# EAGLE board PCB (EAGLE 9.7.0)
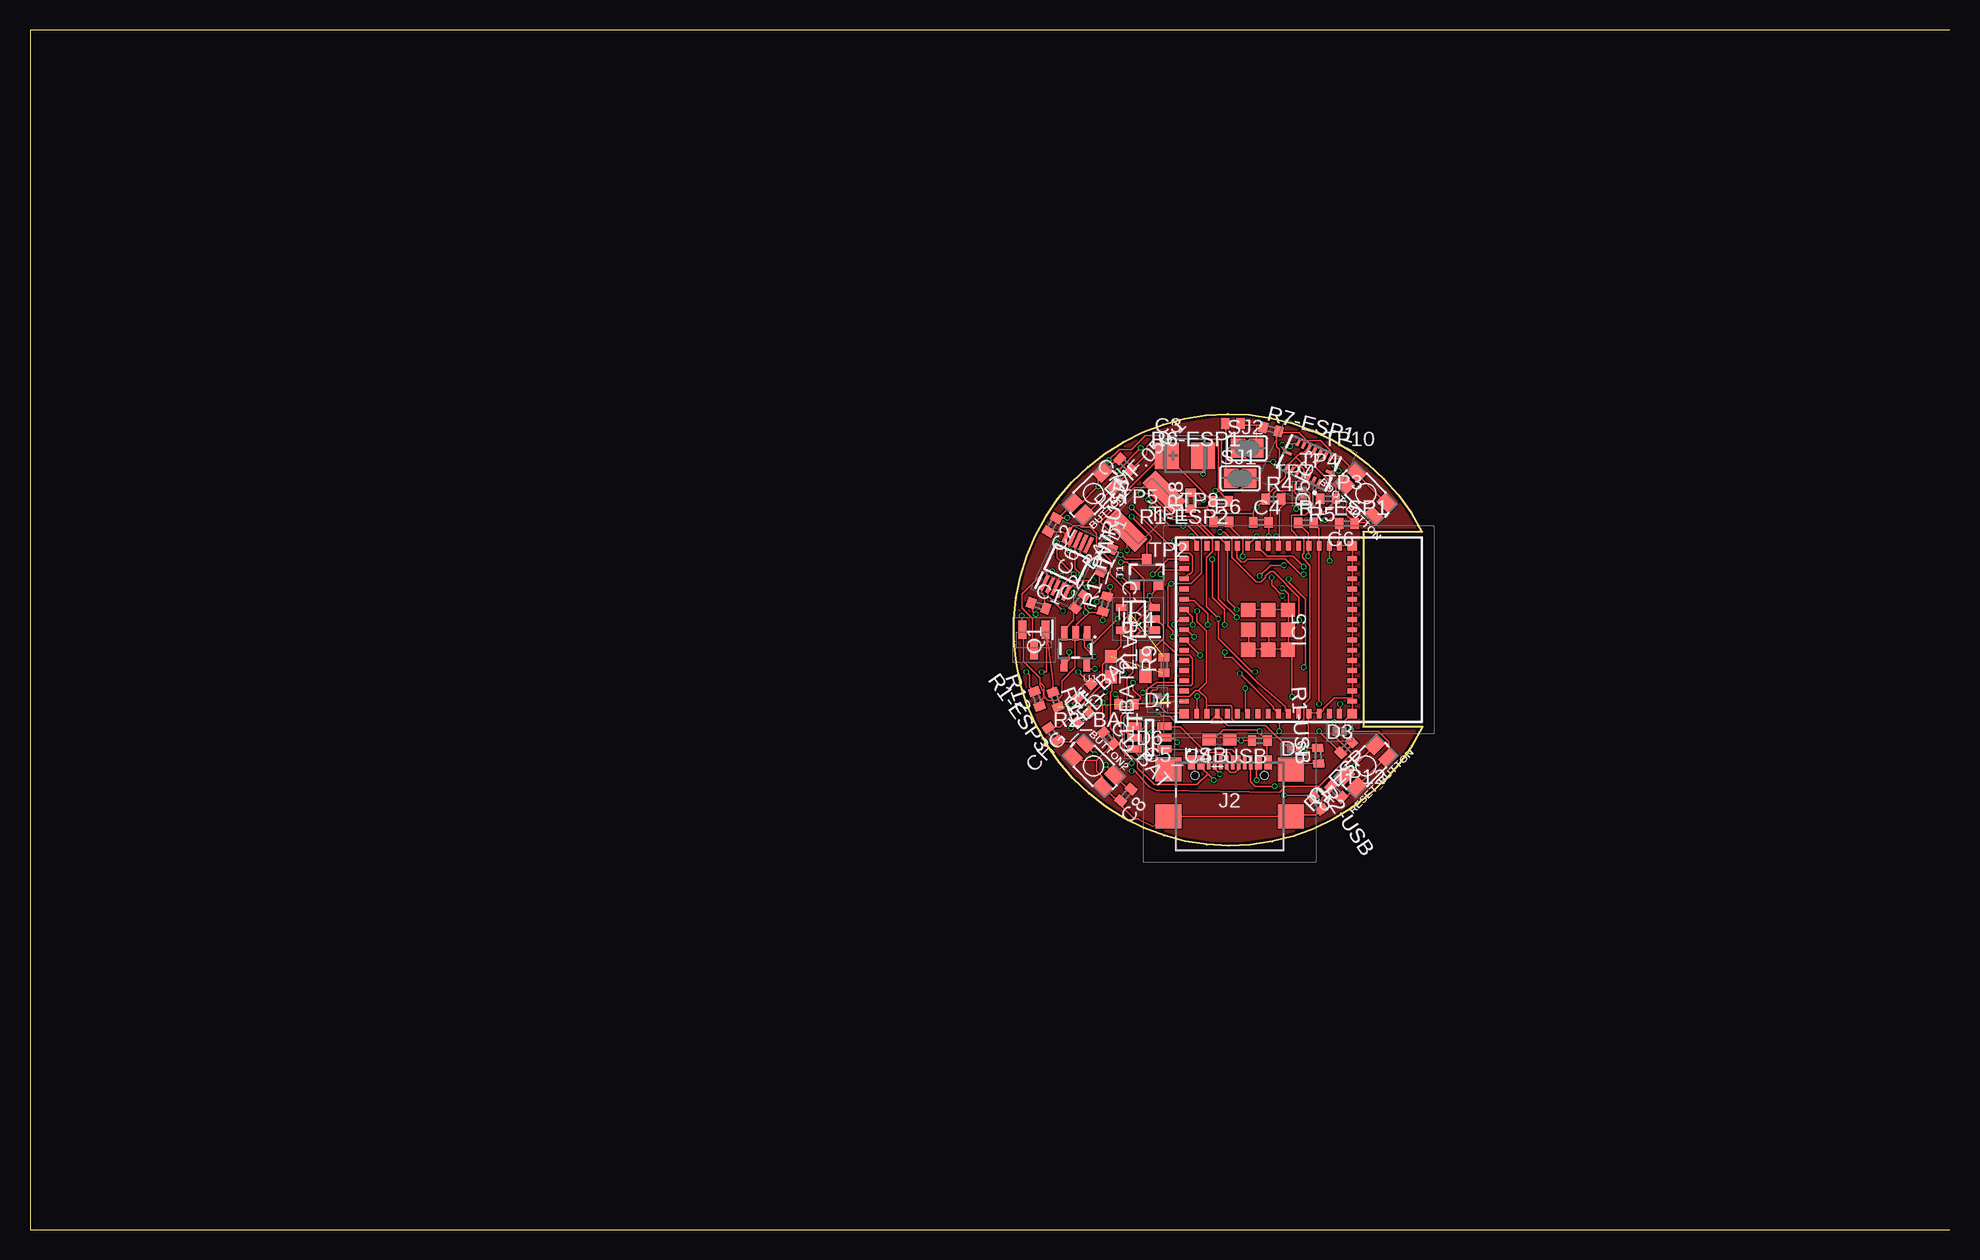
[diagram p0: board, top side]
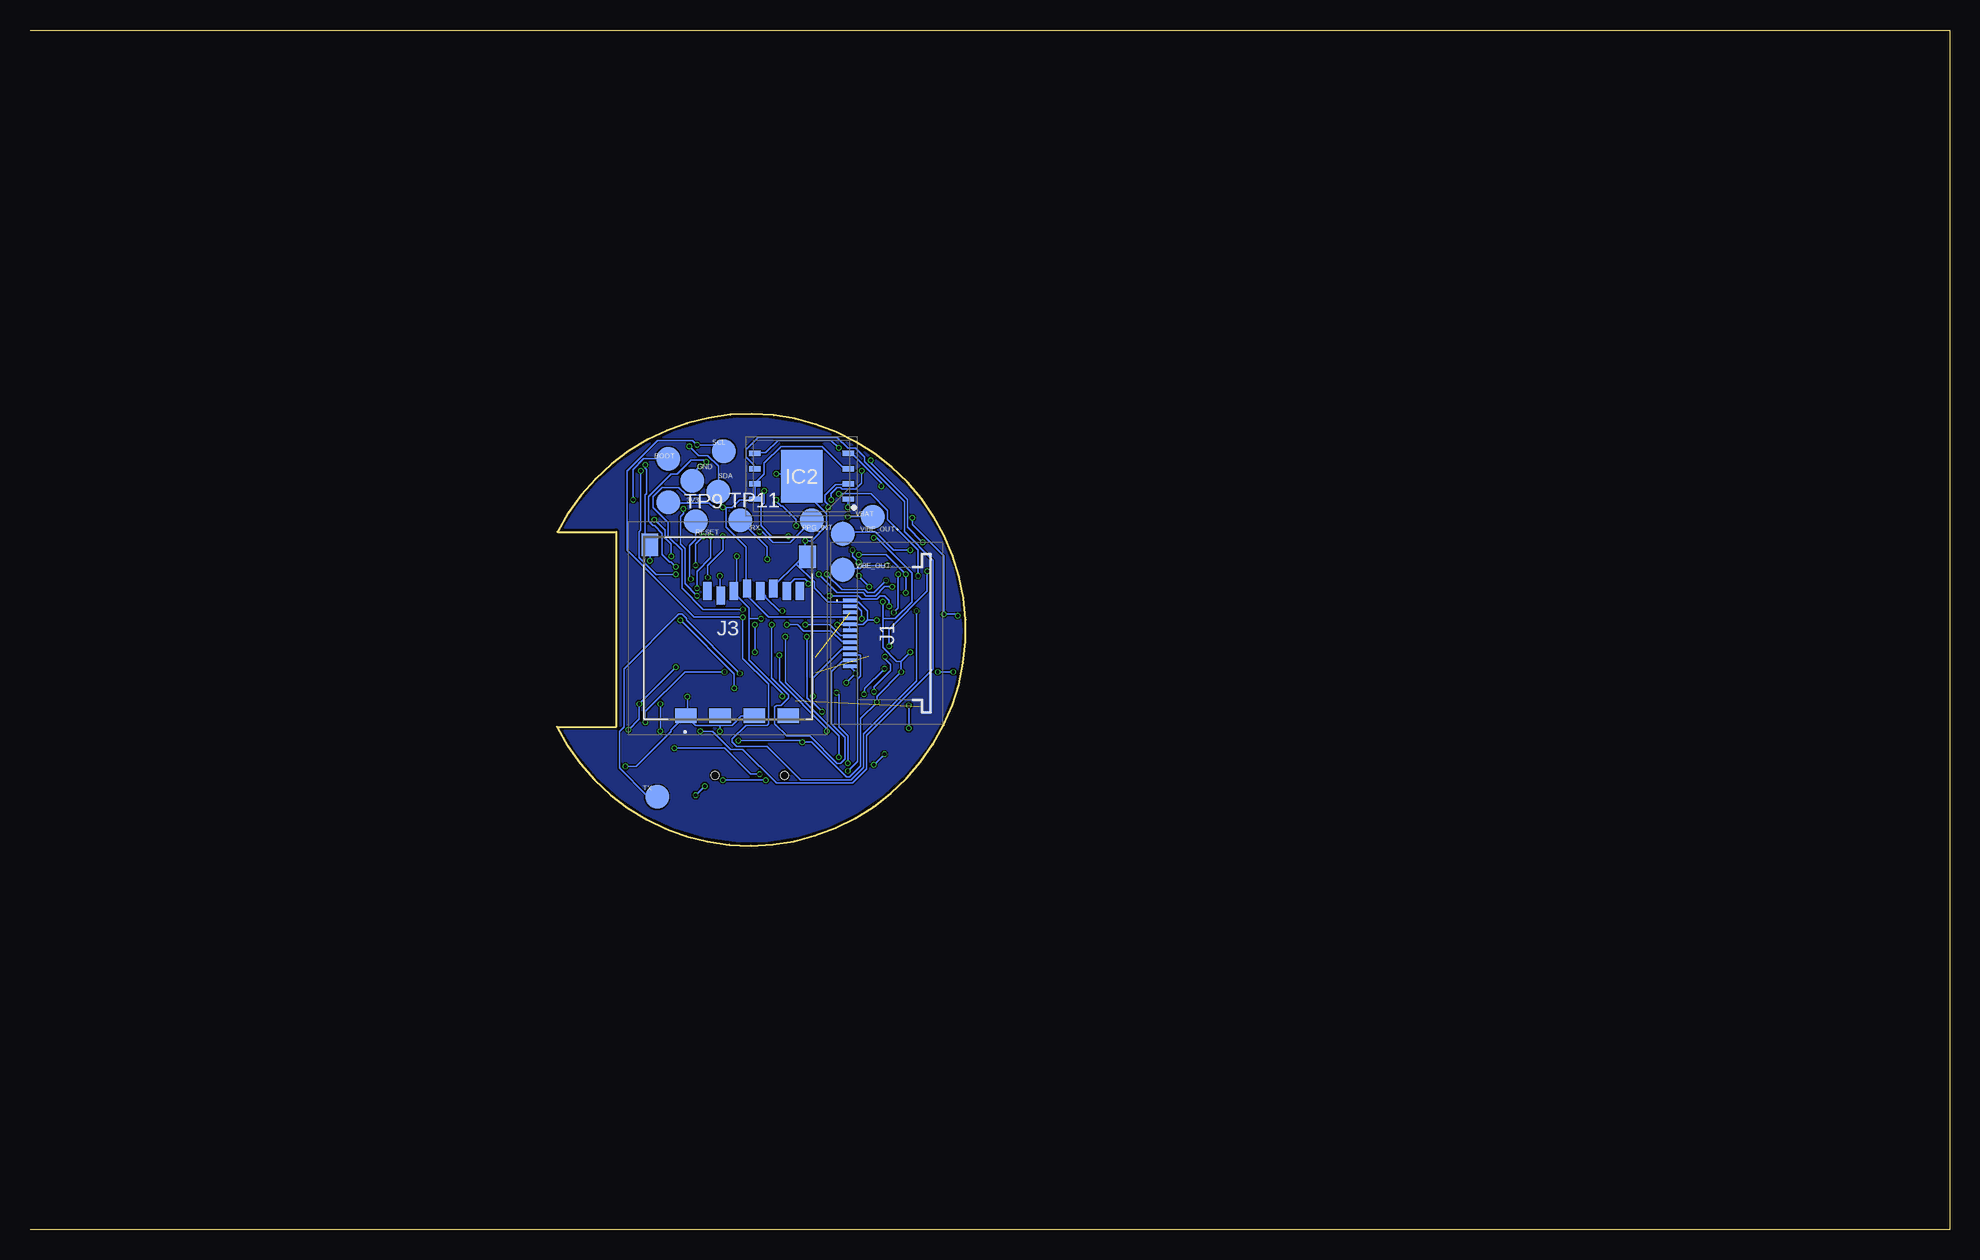
[diagram p1: board, bottom side, seen from below]

Size 160 x 100 mm. Coordinates in mm from the lower left corner, seen from the top.
Outline: 160,0 0,0 0,100 160,100
Outline: 116.08,41.91 arc-306 116.03,58.16 111.13,58.16 111.13,41.91 116.08,41.91
Copper layers (1*16): Top / Bottom
Stack-up Default Layer Stack: Top User Defined 0.035mm / Dielectric-1 User Defined 1.6mm / Bottom User Defined 0.035mm
Design rules: minimum copper width 5mil, minimum drill size 0.3mm, copper clearance wire_polygon to wire_polygon 5mil, copper clearance wire_polygon to pad_smd 5mil, copper clearance wire_polygon to via 5mil, copper clearance pad_smd to pad_smd 5mil, copper clearance pad_smd to via 5mil, copper clearance via to via 5mil, copper clearance smd to pad (same net) 5mil, copper clearance smd to via (same net) 5mil, copper clearance smd to smd (same net) 5mil, dimension clearance 0.2mm, restrict clearance 0mil, via restrict clearance 0mil, drill distance 6mil, keepout clearance 0mil

## Footprints (pad centres in the part's own frame; a part is rotated, then mirrored left to right if it is on the bottom)
SPARKFUN-SWITCHES_TACTILE_SWITCH_SMD_4.6X2.8MM = smd 1.4 x 1.05: 1 -1.796,-0.673; 2 1.796,-0.673; 3 1.796,0.673 | smd 1.4 x 0.9: 4 -1.796,0.8
EAGLE-LTSPICE_C0402 = smd 0.7 x 0.9: 1 -0.65,0; 2 0.65,0
RCL_C0603 = smd 1.1 x 1: 1 -0.85,0; 2 0.85,0
CT3528 = smd 2 x 2.2: + -1.5,0; - 1.5,0
ADAFRUIT_CHIP-LED0603 = smd 0.8 x 0.8: A 0,-0.75; C 0,0.75
AVX---SD0805S020S1R0_AVX_SD0805S020S1R0_0 = smd 0.8 x 0.9: 1 -1.05,0; 2 1.05,0
PESD5V0S1BL315 = smd 0.4 x 0.7: 1 -0.35,0; 2 0.35,0
SOT95P280X145-6N = smd 1.2 x 0.6: 1 -1.25,0.95; 2 -1.25,0; 3 -1.25,-0.95; 4 1.25,-0.95; 5 1.25,0; 6 1.25,0.95
SON127P800X600X80-9N = smd 0.95 x 0.45: 1 -3.9,1.905; 2 -3.9,0.635; 3 -3.9,-0.635; 4 -3.9,-1.905; 5 3.9,-1.905; 6 3.9,-0.635; 7 3.9,0.635; 8 3.9,1.905 | smd 3.45 x 4.35: 9 0,0
BMI085 = smd 0.675 x 0.25: 1 1.165,1.5; 2 1.165,1; 3 1.165,0.5; 4 1.165,0; 5 1.165,-0.5; 6 1.165,-1; 7 1.165,-1.5; 9 -1.165,-1.5; 10 -1.165,-1; 11 -1.165,-0.5; 12 -1.165,0; 13 -1.165,0.5; 14 -1.165,1; 15 -1.165,1.5 | smd 0.25 x 0.675: 8 0,-1.915; 16 0,1.915
SOT95P280X120-5N = smd 0.9 x 0.6: 1 -1.4,0.95; 2 -1.4,0; 3 -1.4,-0.95; 4 1.4,-0.95; 5 1.4,0.95
ESP32S3MINI1N8 = smd 0.8 x 0.4: 1 -7,5.95; 2 -7,5.1; 3 -7,4.25; 4 -7,3.4; 5 -7,2.55; 6 -7,1.7; 7 -7,0.85; 8 -7,0; 9 -7,-0.85; 10 -7,-1.7; 11 -7,-2.55; 12 -7,-3.4; 13 -7,-4.25; 14 -7,-5.1; 15 -7,-5.95; 31 7,-5.95; 32 7,-5.1; 33 7,-4.25; 34 7,-3.4; 35 7,-2.55; 36 7,-1.7; 37 7,-0.85; 38 7,0; 39 7,0.85; 40 7,1.7; 41 7,2.55; 42 7,3.4; 43 7,4.25; 44 7,5.1; 45 7,5.95 | smd 0.4 x 0.8: 16 -5.95,-7; 17 -5.1,-7; 18 -4.25,-7; 19 -3.4,-7; 20 -2.55,-7; 21 -1.7,-7; 22 -0.85,-7; 23 0,-7; 24 0.85,-7; 25 1.7,-7; 26 2.55,-7; 27 3.4,-7; 28 4.25,-7; 29 5.1,-7; 30 5.95,-7; 46 5.95,7; 47 5.1,7; 48 4.25,7; 49 3.4,7; 50 2.55,7; 51 1.7,7; 52 0.85,7; 53 0,7; 54 -0.85,7; 55 -1.7,7; 56 -2.55,7; 57 -3.4,7; 58 -4.25,7; 59 -5.1,7; 60 -5.95,7 | smd 1.2 x 1.2: 61 0,0; 66 -1.65,1.65; 67 -1.65,0; 68 -1.65,-1.65; 69 0,-1.65; 70 1.65,-1.65; 71 1.65,0; 72 1.65,1.65; 73 0,1.65 | smd 0.8 x 0.8: 62 -7,7; 63 -7,-7; 64 7,-7; 65 7,7
SOP50P490X110-10N = smd 1.4 x 0.3: 1 -2.2,1; 2 -2.2,0.5; 3 -2.2,0; 4 -2.2,-0.5; 5 -2.2,-1; 6 2.2,-1; 7 2.2,-0.5; 8 2.2,0; 9 2.2,0.5; 10 2.2,1
PCA6LA12HL3TR = smd 0.3 x 1.2: 1 -2.75,-3.65; 2 -2.25,-3.65; 3 -1.75,-3.65; 4 -1.25,-3.65; 5 -0.75,-3.65; 6 -0.25,-3.65; 7 0.25,-3.65; 8 0.75,-3.65; 9 1.25,-3.65; 10 1.75,-3.65; 11 2.25,-3.65; 12 2.75,-3.65
USB4110GFA = smd 0.3 x 1.15: A1 -3.35,3.678; A4 -2.55,3.678; A5 -1.25,3.678; A6 -0.25,3.678; A7 0.25,3.678; A8 1.25,3.678; A9 2.55,3.678; A12 3.35,3.678; B1 3.05,3.678; B4 2.25,3.678; B5 1.75,3.678; B6 0.75,3.678; B7 -0.75,3.678; B8 -1.75,3.678; B9 -2.25,3.678; B12 -3.05,3.678 | smd 2.18 x 2: MP1 -5.11,-0.827; MP2 5.11,-0.827; MP3 -5.11,3.103; MP4 5.11,3.103 | hole 0.65: -2.89,2.603; 2.89,2.603
112ATAARR03ATTEND = smd 1.8 x 1.2: G1 10.6,10.4; G2 4.9,10.4; S1 7.75,10.4; S2 2.05,10.4 | smd 1.4 x 1.9: G3 13.6,-3.85; G4 0.45,-2.85 | smd 0.7 x 1.5: P1 8.8,0; P2 7.7,0.4; P3 6.6,0; P4 5.5,-0.2; P5 4.4,0; P6 3.3,-0.2; P7 2.2,0; P8 1.1,0
VARISTOR_CT/CN1812 = smd 1.5 x 3.6: 1 -2.25,0; 2 2.25,0
SOT96P240X120-3N = smd 1.55 x 0.65: 1 -0.85,0.96; 2 -0.85,-0.96; 3 0.85,0
EAGLE-LTSPICE_R0402 = smd 0.7 x 0.9: 1 -0.65,0; 2 0.65,0
SJ = smd 1.168 x 1.6: 1 -0.762,0; 2 0.762,0
SPARKFUN-DISCRETESEMI_SOT23-3 = smd 0.8 x 0.9: 1 -0.95,-1; 2 0.95,-1; 3 0,1.1
TP20R = smd 2 x 2: TP 0,0
SPARKFUN-IC-POWER_SOT23-5 = smd 0.55 x 1.2: 1 -0.95,-1.3; 2 0,-1.3; 3 0.95,-1.3; 4 0.95,1.3; 5 -0.95,1.3

## Placement (x,y rotation side)
BOOT_BUTTON  [SPARKFUN-SWITCHES_TACTILE_SWITCH_SMD_4.6X2.8MM]  111.35,61.35 135 top
BUTTON1  [SPARKFUN-SWITCHES_TACTILE_SWITCH_SMD_4.6X2.8MM]  88.65,61.35 225 top
BUTTON2  [SPARKFUN-SWITCHES_TACTILE_SWITCH_SMD_4.6X2.8MM]  88.65,38.65 315 top
C1  1uF  [EAGLE-LTSPICE_C0402]  84.07,52.01 339.9 top
C1_BAT  4.7uF  [EAGLE-LTSPICE_C0402]  89.88,40.94 309.9 top
C1_BAT1  4.7uF 0603  [RCL_C0603]  92.98,46.98 90.4 top
C1_BAT2  4.7uF 0603  [RCL_C0603]  90.12,46.93 270 top
C2  1uF  [EAGLE-LTSPICE_C0402]  85.21,58.75 240 top
C2_BAT  4.7uF  [EAGLE-LTSPICE_C0402]  87.48,52.34 53.4 top
C3  100uF TANT C  [CT3528]  96.28,64.51 0 top
C4  100nF  [EAGLE-LTSPICE_C0402]  102.6,58.95 0 top
C4_USB  100nF  [EAGLE-LTSPICE_C0402]  102.5,40.76 180 top
C5  1uF  [EAGLE-LTSPICE_C0402]  108.88,36.48 135 top
C5_USB  4.7uF 0603  [RCL_C0603]  99.14,40.86 180 top
C6  100nF  [EAGLE-LTSPICE_C0402]  109.77,58.85 180 top
C7  100nF  [EAGLE-LTSPICE_C0402]  91.3,63.77 135 top
C8  100nF  [EAGLE-LTSPICE_C0402]  91.36,36.23 228 top
CHG_LED  [ADAFRUIT_CHIP-LED0603]  87.92,44.93 135 top
D1  AVX---SD0805S020S1R0_AVX_SD0805S020S1R0AVX_SD0805S020S1R0_0_0  [AVX---SD0805S020S1R0_AVX_SD0805S020S1R0_0]  89.7,55.81 65 top
D2  PESD3V3S1BLYL  [PESD5V0S1BL315]  105.37,40.12 180 top
D3  PESD3V3S1BLYL  [PESD5V0S1BL315]  109.15,41.52 180 top
D4  PESD3V3S1BLYL  [PESD5V0S1BL315]  93.98,44.14 90 top
D5  PESD3V3S1BLYL  [PESD5V0S1BL315]  106.07,61.36 90 top
D6  USBLC6-2SC6Y  [SOT95P280X145-6N]  93.32,41 0 top
IC2  W25Q256JVEIQ  [SON127P800X600X80-9N]  95.68,62.8 180 bottom
IC3  BMI085  [BMI085]  106.59,63.93 245 top
IC4  XC6220A331MR-G  [SOT95P280X120-5N]  92.35,50.9 180 top
IC5  ESP32-S3-MINI-1-N8  [ESP32S3MINI1N8]  103.21,50 270 top
IC6  DRV2605LDGST  [SOP50P490X110-10N]  86.41,55.49 65 top
J1  PCA-6-LA-12-HL-3-T_R  [PCA6LA12HL3TR]  87.98,49.69 270 bottom
J2  USB4110-GF-A  [USB4110GFA]  100,35.26 0 top
J3  112A-TAAR-R03_ATTEND  [112ATAARR03ATTEND]  94.73,53.24 180 bottom
PFMF.050.1  500mA  [VARISTOR_CT/CN1812]  92.95,59.89 45 top
Q1  2N7002  [SOT96P240X120-3N]  83.69,49.15 270 top
R1-ESP  10K  [EAGLE-LTSPICE_R0402]  109.7,40.19 225 top
R1-ESP1  10K  [EAGLE-LTSPICE_R0402]  106.35,58.91 0 top
R1-ESP2  10K  [EAGLE-LTSPICE_R0402]  99.29,60.72 180 top
R1-ESP3  10K  [EAGLE-LTSPICE_R0402]  85.26,41.3 125 top
R1-USB  5K1  [EAGLE-LTSPICE_R0402]  107.37,39.49 93.5 top
R1_BAT  200  [EAGLE-LTSPICE_R0402]  87.79,42.67 40 top
R1_PWRUSB  100K  [EAGLE-LTSPICE_R0402]  89.6,52.15 75 top
R2-USB  5K1  [EAGLE-LTSPICE_R0402]  107.33,35.58 303.6 top
R2_BAT  2K  [EAGLE-LTSPICE_R0402]  91.41,43.79 180 top
R4  10K  [EAGLE-LTSPICE_R0402]  103.64,60.9 0 top
R5  10K  [EAGLE-LTSPICE_R0402]  108.2,60.92 180 top
R6  10K  [EAGLE-LTSPICE_R0402]  99.3,59.01 0 top
R6-ESP1  100K  [EAGLE-LTSPICE_R0402]  100.27,67.18 180 top
R7-ESP1  100K  [EAGLE-LTSPICE_R0402]  103.45,66.71 345 top
R8  10K  [EAGLE-LTSPICE_R0402]  96.76,60.75 90 top
R9  22  [EAGLE-LTSPICE_R0402]  94.53,47.06 90 top
R11  10K  [EAGLE-LTSPICE_R0402]  85.48,44.17 290 top
R12  10K  [EAGLE-LTSPICE_R0402]  83.94,44.24 110 top
RESET_BUTTON  [SPARKFUN-SWITCHES_TACTILE_SWITCH_SMD_4.6X2.8MM]  111.35,38.65 225 top
SJ1  [SJ]  100.87,62.63 0 top
SJ2  [SJ]  101.45,65.13 0 top
T1  20V/4.2A/52mΩ/1.4W  [SPARKFUN-DISCRETESEMI_SOT23-3]  93.08,54.75 0 top
TP1  TPTP20R  [TP20R]  92.25,58 0 bottom
TP2  TPTP20R  [TP20R]  92.25,55 0 bottom
TP3  TPTP20R  [TP20R]  106.8,60.63 0 bottom
TP4  TPTP20R  [TP20R]  104.8,62.43 0 bottom
TP5  TPTP20R  [TP20R]  89.76,59.43 0 bottom
TP6  TPTP20R  [TP20R]  102.16,64.88 0 bottom
TP7  TPTP20R  [TP20R]  102.61,61.51 0 bottom
TP8  TPTP20R  [TP20R]  94.82,59.14 0 bottom
TP9  TPTP20R  [TP20R]  104.5,59.04 0 bottom
TP10  TPTP20R  [TP20R]  106.8,64.24 0 bottom
TP11  TPTP20R  [TP20R]  100.79,59.14 0 bottom
TP12  TPTP20R  [TP20R]  107.72,36.07 0 bottom
U1  SPARKFUN-IC-POWER_MCP73831  [SPARKFUN-IC-POWER_SOT23-5]  87.15,48.41 179.6 top

## Library data of the parts
BOOT_BUTTON BUTTON1 BUTTON2 RESET_BUTTON = button; PROD_ID: SWCH-14139; SF_SKU: COM-08720
C1 C1_BAT C2 C2_BAT C4 C4_USB C5-C8 = Hector_Watch; SPICEMODEL: NONE; SPICEPREFIX: C
C1_BAT1 C1_BAT2 C3 C5_USB = Hector_Watch; SPICEPREFIX: C
CHG_LED PFMF.050.1 SJ1 SJ2 TP1-TP12 = Hector_Watch
D1 = Hector_Watch; CENTROID_NOT_SPECIFIED: No; DATASHEET: http://datasheets.avx.com/schottky.pdf; DIGIKEY_DESCRIPTION: DIODE SCHOTTKY 20V 1A 0805; DIGIKEY_PART_NUMBER: 478-7800-1-ND; LEAD_FREE: yes; MF: AVX; MOUSER_PART_NUMBER: 581-SD0805S020S1R0; MPN: SD0805S020S1R0; PACKAGE: 0805 (2012 metric); PREFIX: D; ROHS: yes; TEMPERATURE_RANGE_HIGH: +125°C; TEMPERATURE_RANGE_LOW: -55°C
D2-D5 = Hector_Watch; ARROW_PART_NUMBER: PESD3V3S1BLYL; ARROW_PRICE-STOCK: https://www.arrow.com/en/products/pesd3v3s1blyl/nexperia?region=nac; DESCRIPTION: PESD3V3S1BL - Low capacitance bidirectional ESD protection diode; HEIGHT: 0mm; MANUFACTURER_NAME: Nexperia; MANUFACTURER_PART_NUMBER: PESD3V3S1BLYL; MOUSER_PART_NUMBER: 771-PESD3V3S1BLYL; MOUSER_PRICE-STOCK: https://www.mouser.co.uk/ProductDetail/Nexperia/PESD3V3S1BLYL?qs=vLWxofP3U2zWoKHYJMVoKQ%3D%3D
D6 = Hector_Watch; ARROW_PART_NUMBER: USBLC6-2SC6Y; ARROW_PRICE-STOCK: https://www.arrow.com/en/products/usblc6-2sc6y/stmicroelectronics?region=nac; DESCRIPTION: Low Cap. ESD Protection Auto SOT-23-6 STMicroelectronics USBLC6-2SC6Y, Dual Uni-Directional TVS Diode Array, 6-Pin SOT-23; HEIGHT: 1.45mm; MANUFACTURER_NAME: STMicroelectronics; MANUFACTURER_PART_NUMBER: USBLC6-2SC6Y; MOUSER_PART_NUMBER: 511-USBLC6-2SC6Y; MOUSER_PRICE-STOCK: https://www.mouser.co.uk/ProductDetail/STMicroelectronics/USBLC6-2SC6Y?qs=gNDSiZmRJS%2FOgDexvXkdow%3D%3D
IC2 = Hector_Watch; ARROW_PART_NUMBER: W25Q256JVEIQ; ARROW_PRICE-STOCK: https://www.arrow.com/en/products/w25q256jveiq/winbond-electronics?region=nac; DESCRIPTION: 256M-bit Serial Flash Memory with uniform 4KB sectors and Dual/Quad SPI; HEIGHT: 0.8mm; MANUFACTURER_NAME: Winbond; MANUFACTURER_PART_NUMBER: W25Q256JVEIQ; MOUSER_PART_NUMBER: 454-W25Q256JVEIQ; MOUSER_PRICE-STOCK: https://www.mouser.co.uk/ProductDetail/Winbond/W25Q256JVEIQ?qs=qSfuJ%252Bfl%2Fd4o%2FNFUf7yCgA%3D%3D
IC3 = Hector_Watch; ARROW_PART_NUMBER: BMI085; ARROW_PRICE-STOCK: https://www.arrow.com/en/products/bmi085/bosch; DESCRIPTION: IMUs - Inertial Measurement Units High-performance IMU BMI085 for virtual and augmented reality applications; HEIGHT: 1mm; MANUFACTURER_NAME: BOSCH; MANUFACTURER_PART_NUMBER: BMI085; MOUSER_PART_NUMBER: 262-BMI085; MOUSER_PRICE-STOCK: https://www.mouser.co.uk/ProductDetail/Bosch-Sensortec/BMI085?qs=y6ZabgHbY%252ByGCM8LfWZyqA%3D%3D
IC4 = Hector_Watch; DESCRIPTION: LDO Voltage Regulators; HEIGHT: 1.2mm; MANUFACTURER_NAME: Torex; MANUFACTURER_PART_NUMBER: XC6220A331MR-G; MOUSER_PART_NUMBER: 865-XC6220A331MR-G; MOUSER_PRICE-STOCK: https://www.mouser.co.uk/ProductDetail/Torex-Semiconductor/XC6220A331MR-G?qs=AsjdqWjXhJ8ZSWznL1J0gg%3D%3D
IC5 = Hector_Watch; DESCRIPTION: WiFi Development Tools - 802.11 [Engineering Samples] SMD Module, ESP32-S3FN8, 8 MB SPI Flash, PCB Antenna; HEIGHT: 2.55mm; MANUFACTURER_NAME: Espressif Systems; MANUFACTURER_PART_NUMBER: ESP32-S3-MINI-1-N8; MOUSER_PART_NUMBER: 356-ESP32-S3-MINI1N8; MOUSER_PRICE-STOCK: https://www.mouser.co.uk/ProductDetail/Espressif-Systems/ESP32-S3-MINI-1-N8?qs=XAiT9M5g4x82rl6F%2FIYUQg%3D%3D
IC6 = Hector_Watch; ARROW_PART_NUMBER: DRV2605LDGST; ARROW_PRICE-STOCK: https://www.arrow.com/en/products/drv2605ldgst/texas-instruments?region=nac; DESCRIPTION: ERM & LRA Device Haptic Driver 2-5V BGA9 Texas Instruments DRV2605LDGST Piezo Haptic Motor Driver IC, 5 V, 10-Pin VSSOP; HEIGHT: 1.1mm; MANUFACTURER_NAME: Texas Instruments; MANUFACTURER_PART_NUMBER: DRV2605LDGST; MOUSER_PART_NUMBER: 595-DRV2605LDGST; MOUSER_PRICE-STOCK: https://www.mouser.co.uk/ProductDetail/Texas-Instruments/DRV2605LDGST?qs=asCBFxFfL1TjvcNdZsR2BA%3D%3D
J1 = display; DESCRIPTION: CONN FFC BOTTOM 12POS 0.5MM R/A; HEIGHT: 2.808mm; MANUFACTURER_NAME: Adam Tech; MANUFACTURER_PART_NUMBER: PCA-6-LA-12-HL-3-T/R
J2 = Hector_Watch; DESCRIPTION: CONN USB 2.0 TYPE-C R/A SMT; HEIGHT: 3.26mm; MANUFACTURER_NAME: GCT (GLOBAL CONNECTOR TECHNOLOGY); MANUFACTURER_PART_NUMBER: USB4110-GF-A; MOUSER_PART_NUMBER: 640-USB4110-GF-A; MOUSER_PRICE-STOCK: https://www.mouser.co.uk/ProductDetail/GCT/USB4110-GF-A?qs=KUoIvG%2F9IlYiZvIXQjyJeA%3D%3D
J3 = Hector_Watch; DESCRIPTION: Micro SD Card Socket, Push-Push Type, Top Mount, SMT, H=1.83mm, 10u; HEIGHT: 1.9mm; MANUFACTURER_NAME: ATTEND; MANUFACTURER_PART_NUMBER: 112A-TAAR-R03 ATTEND
Q1 = Hector_Watch; ARROW_PART_NUMBER: 2N7002; ARROW_PRICE-STOCK: https://www.arrow.com/en/products/2n7002/on-semiconductor?region=europe; DESCRIPTION: N-channel MOSFET,2N7002 0.115A 60V; HEIGHT: 1.2mm; MANUFACTURER_NAME: onsemi; MANUFACTURER_PART_NUMBER: 2N7002; MOUSER_PART_NUMBER: 512-2N7002; MOUSER_PRICE-STOCK: https://www.mouser.co.uk/ProductDetail/onsemi-Fairchild/2N7002?qs=0dwsXDNhqlz66WJJhrTFjQ%3D%3D
R1-ESP R1-ESP1-R1-ESP3 R1-USB R1_BAT R1_PWRUSB R2-USB R2_BAT R4-R6 R6-ESP1 R7-ESP1 R8 R9 R11 R12 = Hector_Watch; SPICEMODEL: NONE; SPICEPREFIX: R
T1 = Hector_Watch; PROD_ID: TRANS-14715
U1 = Hector_Watch; PROD_ID: IC-09995

## Nets
3V3: C1_BAT2.1 C2.2 C3.+ C4.1 IC2.3 IC2.7 IC2.8 IC3.3 IC3.7 IC3.11 IC3.14 IC4.5 IC5.3 IC6.10 J1.4 J3.P4 R1-ESP1.2 R1-ESP2.2 R1-ESP3.2 R1-ESP.2 R4.1 R5.1 R6.1 R8.1 R9.1 TP3.TP
ADC_BAT: IC5.9 SJ2.1
BOOT: BOOT_BUTTON.3 BOOT_BUTTON.4 C6.1 IC5.4 R1-ESP1.1 TP10.TP
BUTTON1: BUTTON1.3 BUTTON1.4 C7.1 IC5.15 R1-ESP2.1
BUTTON2: BUTTON2.3 BUTTON2.4 C8.1 IC5.26 R1-ESP3.1
D+: D6.1 IC5.24
D-: D6.3 IC5.23
DISP_RST: IC5.20 J1.11
DN: D6.4 J2.A7 J2.B7
DP: D6.6 J2.A6 J2.B6
EN_DRV: IC5.17 IC6.5
GND: BOOT_BUTTON.1 BOOT_BUTTON.2 BUTTON1.1 BUTTON1.2 BUTTON2.1 BUTTON2.2 C1.1 C1_BAT1.2 C1_BAT2.2 C1_BAT.2 C2.1 C2_BAT.2 C3.- C4.2 C4_USB.1 C5.2 C5_USB.2 C6.2 C7.2 C8.2 D2.1 D3.1 D4.1 D5.1 D6.2 IC2.4 IC2.9 IC3.4 IC3.6 IC3.10 IC3.15 IC4.2 IC5.1 IC5.2 IC5.42 IC5.43 IC5.46 IC5.47 IC5.48 IC5.49 IC5.50 IC5.51 IC5.52 IC5.53 IC5.54 IC5.55 IC5.56 IC5.57 IC5.58 IC5.59 IC5.60 IC5.61 IC5.62 IC5.63 IC5.64 IC5.65 IC5.66 IC5.67 IC5.68 IC5.69 IC5.70 IC5.71 IC5.72 IC5.73 IC6.8 J1.1 J1.5 J1.6 J1.12 J2.A1 J2.A12 J2.B1 J2.B12 J2.MP1 J2.MP2 J2.MP3 J2.MP4 J3.G1 J3.G2 J3.G3 J3.G4 J3.P6 Q1.2 R1-USB.1 R1_PWRUSB.1 R2-USB.2 R2_BAT.1 R7-ESP1.2 R12.1 RESET_BUTTON.1 RESET_BUTTON.2 TP4.TP U1.2
IMU_INT1: IC3.16 IC5.11
IMU_INT2: IC3.1 IC5.10
IN_DRV: IC5.16 IC6.4
LEDA: J1.3 R9.2
LEDK: J1.2 Q1.3
MISO: D2.2 IC2.2 IC5.33 J3.P7 R8.2
MOSI: D3.2 IC2.5 IC5.31 J1.10 J3.P3 R6.2
N$1: J2.B5 R2-USB.1
N$2: J2.A5 R1-USB.2
N$3: C1.2 IC6.1
N$4: C1_BAT1.1 D1.1 IC4.1 IC4.3 T1.2
N$5: CHG_LED.C R1_BAT.1
N$6: R6-ESP1.2 SJ1.1
N$7: R6-ESP1.1 R7-ESP1.1 SJ2.2
N$8: R2_BAT.2 U1.5
N$9: Q1.1 R11.1 R12.2
N$10: R1_BAT.2 U1.1
PIN_LED: IC5.30 R11.2
PPG_INT: IC5.36 TP8.TP
RESET: C5.1 IC5.45 R1-ESP.1 RESET_BUTTON.3 RESET_BUTTON.4 TP9.TP
RX: IC5.40 TP11.TP
SCK: D4.2 IC2.6 IC5.32 J1.9 J3.P5 R5.2
SCL: IC3.8 IC5.13 IC6.2 TP6.TP
SDA: IC3.9 IC5.12 IC6.3 TP7.TP
SS_FLASH: IC2.1 IC5.18
SS_SD: D5.2 IC5.7 J3.P2 R4.2
SS_TFT: IC5.21 J1.8
TFT_DC: IC5.22 J1.7
TX: IC5.39 TP12.TP
VBAT: C2_BAT.1 SJ1.2 T1.3 TP5.TP U1.3
VBUS: C1_BAT.1 C4_USB.2 C5_USB.1 CHG_LED.A D1.2 D6.5 PFMF.050.1.2 R1_PWRUSB.2 T1.1 U1.4
VIBE_OUT+: IC6.9 TP1.TP
VIBE_OUT-: IC6.7 TP2.TP
VUSB: J2.A4 J2.A9 J2.B4 J2.B9 PFMF.050.1.1

## Tracks (layer width: path | path; a pad name or v marks a point on that pad's centre or on a via)
3V3  (via drill 0.3)  (1 unrouted)
  Top 0.127: R1-ESP3.2 84.96,41.91 85.85,41.91 89.41,45.47 89.41,47.12 90.04,47.75 C1_BAT2.1 90.17,47.88 90.93,48.64 90.93,49.91 IC4.5 91.06,50.04 91.06,50.67 91.69,51.31 91.69,52.96 90.04,54.61 90.04,55.75 88.9,56.9 88.9,58.04 88.39,58.55 | C2.2 84.96,58.17 86.11,58.17 86.36,57.91 IC6.10 86.49,57.91 86.49,58.17 87,58.67 87.5,58.67 87.63,58.55 88.39,58.55 | 88.39,58.55 94.23,64.39 94.74,64.39 C3.+ 94.87,64.39 98.55,60.71 | 105.54,64.39 105.92,64.77 106.17,64.77 106.55,65.15 IC3.11 | 105.54,64.39 104.78,63.63 IC3.7 104.65,63.5 104.65,62.74 102.87,60.96 R4.1 102.87,60.83 v102.23,60.2 101.98,59.94 101.98,59.69 | 106.68,63.25 106.68,63.12 106.55,62.99 106.55,62.74 IC3.3 | 105.54,64.39 106.68,63.25 | 106.68,63.25 107.06,63.63 | 107.06,63.63 107.95,64.52 IC3.14 | 101.98,59.69 101.98,59.05 C4.1 | 98.04,60.2 96.77,60.2 R8.1 | 98.55,60.71 98.04,60.2 | 98.55,59.69 98.55,59.05 R6.1 | 98.04,60.2 98.55,59.69 | 98.55,59.69 101.98,59.69 | v107.44,41.53 109.22,39.75 R1-ESP.2 | v107.44,43.81 107.44,56.9 IC5.3 107.44,57.02 107.44,58.42 107.06,58.8 R1-ESP1.2 106.93,58.93 108.84,60.83 R5.1 108.84,60.96 108.84,61.85 107.06,63.63 | 98.55,60.71 R1-ESP2.2
  Bottom 0.127: J1.4 91.69,51.05 98.42,51.05 100.2,52.83 100.2,53.34 J3.P4 100.33,53.47 100.33,56.9 101.98,58.55 101.98,60.2 | IC2.3 91.82,63.5 92.2,63.5 93.98,65.28 97.41,65.28 98.81,63.88 98.81,62.99 99.57,62.23 IC2.7 99.57,62.1 99.57,60.96 IC2.8 99.69,60.83 100.84,60.83 101.47,60.2 101.98,60.2 | 101.98,60.2 v102.23,60.2 103,60.2 103.38,60.58 106.68,60.58 TP3.TP | v107.44,43.81 v107.44,41.53
ADC_BAT  (via drill 0.3)
  Top 0.127: v106.17,55.24 105.28,56.13 103.12,56.13 102.36,56.9 IC5.9 | v103.63,64.01 101.6,64.01 100.58,65.02 SJ2.1
  Bottom 0.127: v106.17,55.24 106.55,55.63 106.68,55.63 107.31,56.26 107.31,58.04 107.95,58.67 108.08,58.67 108.46,59.05 108.46,61.09 106.55,62.99 106.05,62.99 104.9,64.14 103.76,64.14 v103.63,64.01
BOOT  (via drill 0.3)
  Top 0.127: R1-ESP1.1 105.79,58.8 106.55,58.04 106.55,57.02 IC5.4 106.55,56.9 v106.55,56.13 | BOOT_BUTTON.4 112.01,59.44 111.51,58.93 110.49,58.93 C6.1 110.36,58.93 109.73,59.56 | 109.73,59.56 v109.73,60.83 109.73,62.1 BOOT_BUTTON.3 | v107.95,59.18 108.33,59.18 108.71,59.56 109.73,59.56
  Bottom 0.127: v106.55,56.13 106.55,57.15 107.06,57.66 107.06,58.29 v107.95,59.18 | v109.73,60.83 109.73,63.37 108.84,64.26 106.81,64.26 TP10.TP
BUTTON1  (via drill 0.3)
  Top 0.127: v96.77,57.78 97.16,57.4 97.16,57.02 IC5.15 | 99.06,61.59 v98.81,61.59 | 99.06,61.59 99.82,60.83 R1-ESP2.1 | BUTTON1.3 87.88,59.69 88.14,59.69 90.42,61.98 BUTTON1.4 90.55,62.1 91.69,63.25 C7.1 91.82,63.37 93.09,64.64 93.09,65.28 93.73,65.91 98.81,65.91 99.06,65.66 99.06,61.59
  Bottom 0.127: v96.77,57.78 98.17,57.78 99.06,58.67 99.06,60.33 98.81,60.58 v98.81,61.59
BUTTON2  (via drill 0.3)
  Top 0.127: R1-ESP3.1 85.72,40.64 87.76,40.64 87.88,40.51 BUTTON2.4 88.01,40.39 v88.77,39.62 | v91.82,38.86 91.31,38.86 90.42,37.97 | IC5.26 96.14,47.37 95.63,47.37 95.4,45.6 93.9,45.6 93,45 93.07,44.93 93.07,44.77 v92.77,44.77 | C8.1 91.69,36.83 91.44,36.83 90.42,37.85 BUTTON2.3 90.42,37.97 | 90.42,37.97 v89.66,38.73
  Bottom 0.127: v91.82,38.86 91.82,41.15 92.58,41.91 92.58,44.58 v92.77,44.77 | v89.66,38.73 v88.77,39.62
D+  (via drill 0.3)
  Top 0.127: v97.54,47.88 96.27,49.15 IC5.24 | v93.6,41.53 92.46,41.53 92.08,41.91 D6.1
  Bottom 0.127: v97.54,47.88 97.54,45.72 93.6,41.78 v93.6,41.53
D-  (via drill 0.3)
  Top 0.127: v97.03,49.4 96.52,49.91 96.27,49.91 IC5.23 | v92.58,39.37 91.95,40.01 D6.3
  Bottom 0.127: v97.03,49.4 97.03,45.59 92.58,41.15 v92.58,39.37
DISP_RST  (via drill 0.3)
  Top 0.127: v98.17,50.42 98.17,51.31 97.03,52.45 96.27,52.45 IC5.20
  Bottom 0.127: v98.17,50.42 98.17,45.97 96.77,44.58 96.77,44.32 97.41,43.69 97.79,43.69 97.92,43.56 97.92,42.16 96.9,41.15 95,41.15 92.71,38.86 92.46,38.86 92.08,39.24 92.08,41.02 93.19,42.13 93.19,46.51 92.33,47.37 91.69,47.37 J1.11
DN
  Top 0.127: 99.44,39.75 99.31,39.62 99.31,38.99 J2.B7 | 99.44,39.75 99.95,39.75 100.2,39.5 100.2,38.99 J2.A7 | 99.44,39.75 97.66,39.75 97.41,40.01 94.61,40.01 D6.4
DP
  Top 0.127: J2.A6 99.82,38.86 99.82,38.35 100.08,38.1 100.46,38.1 100.71,38.35 100.71,38.86 J2.B6 100.71,38.99 100.71,39.5 100.2,40.01 97.79,40.01 95.89,41.91 94.61,41.91 D6.6
EN_DRV  (via drill 0.3)
  Top 0.127: v94.23,54.61 94.61,54.99 96.14,54.99 IC5.17 | v88.14,53.59 87.88,53.59 87.76,53.72 87,53.72 86.36,53.09 IC6.5
  Bottom 0.127: v94.23,54.61 92.71,53.09 90.55,53.09 90.3,52.83 89.53,52.83 88.77,53.59 v88.14,53.59
GND  (via drill 0.3)
  Top 0.127: IC3.6 105.28,63.37 105.66,63.75 105.79,63.75 106.17,63.37 106.17,62.99 IC3.4 106.17,62.87 105.41,62.1 105.41,61.59 | 105.41,61.59 105.41,61.47 105.79,61.09 106.05,61.09 D5.1 | 105.41,61.59 103.89,61.59 103.63,61.34 103.63,60.45 103.38,60.2 103.38,59.05 C4.2 103.25,58.93 v103.25,57.78 | IC5.68 101.6,51.69 103.12,51.69 IC5.67 103.25,51.69 104.78,51.69 IC5.66 | IC5.72 104.9,48.39 104.9,49.91 IC5.73 104.9,50.04 104.9,51.56 IC5.66 | 101.6,48.39 101.6,49.91 IC5.69 | 103.25,48.39 103.25,49.91 IC5.61 | 101.6,48.39 103.12,48.39 IC5.71 103.25,48.39 | 101.6,48.39 IC5.70 | 103.25,48.39 104.78,48.39 IC5.72 | v104.39,53.47 104.9,52.96 104.9,51.69 IC5.66 | 106.3,65.79 106.3,65.91 105.79,66.42 104.14,66.42 R7-ESP1.2 104.01,66.42 103.89,66.29 103.89,65.28 104.14,65.02 v104.14,63.63 | 106.3,65.79 106.3,65.53 IC3.10 | 108.71,64.26 109.35,64.26 110.49,63.12 BOOT_BUTTON.2 110.62,62.99 113.03,60.58 BOOT_BUTTON.1 | 108.71,64.26 108.46,64.26 IC3.15 108.46,64.39 108.46,64.9 107.57,65.79 106.3,65.79 | 103.12,38.99 103.12,40.64 C4_USB.1 103.12,40.77 102.36,41.53 | 102.36,41.53 102.23,41.66 99.44,41.66 98.68,40.89 98.3,40.89 C5_USB.2 | 103.12,38.99 103.25,38.99 J2.A12 103.38,38.86 104.65,38.86 105.03,38.48 J2.MP4 | 103.12,38.99 J2.B1 | 105.54,38.86 105.16,38.48 J2.MP4 | 105.54,38.86 105.66,38.99 105.66,40.01 D2.1 105.66,40.13 106.55,41.02 106.55,42.93 IC5.42 106.68,43.05 107.44,43.05 IC5.43 107.57,43.05 107.82,43.31 107.82,43.43 108.71,44.32 110.24,44.32 | 105.54,38.86 107.31,38.86 R1-USB.1 | 105.54,38.86 J2.MP4 | 102.36,41.53 v102.49,41.53 | 109.09,57.02 108.33,57.02 IC5.2 108.33,56.9 v108.33,55.75
  Top 0.127: 109.09,57.02 109.09,58.8 C6.2 | 109.09,57.02 IC5.1 109.22,57.02 110.11,57.02 IC5.62 110.24,56.9 110.24,56.01 IC5.60 110.24,55.88 110.24,55.12 IC5.59 110.24,54.99 110.24,54.36 IC5.58 110.24,54.23 110.24,53.47 IC5.57 110.24,53.34 110.24,52.58 IC5.56 110.24,52.45 110.24,51.82 IC5.55 110.24,51.69 110.24,50.93 IC5.54 110.24,50.8 110.24,50.04 IC5.53 110.24,49.91 110.24,49.28 IC5.52 110.24,49.15 110.24,48.39 IC5.51 110.24,48.26 110.24,47.5 IC5.50 110.24,47.37 110.24,46.61 IC5.49 110.24,46.48 110.24,45.85 IC5.48 110.24,45.72 110.24,44.96 IC5.47 110.24,44.83 110.24,44.32 | D3.1 109.6,41.53 109.6,42.42 110.11,42.93 IC5.65 110.24,43.05 110.24,43.94 IC5.46 110.24,44.07 110.24,44.32 | v108.71,63.75 108.71,64.26 | v105.2,44.41 105.2,47.67 IC5.72 | RESET_BUTTON.1 112.14,40.39 v110.36,38.61 109.73,37.97 RESET_BUTTON.2 109.6,37.85 109.35,37.85 108.46,36.96 C5.2 108.33,36.83 108.33,36.58 107.7,35.94 107.7,35.05 R2-USB.2 107.57,34.92 107.19,34.54 105.16,34.54 J2.MP2 105.03,34.42 95,34.42 J2.MP1 94.7,34.24 93.6,33.6 92.4,34.2 92.44,34.24 92.08,34.24 91,35.32 C8.2 90.81,35.81 90.55,35.81 89.53,36.83 BUTTON2.2 89.41,36.96 89.41,37.72 88.9,38.23 88.9,39.12 | 88.9,39.12 90.17,40.39 C1_BAT.2 90.3,40.51 90.3,41.53 90.06,41.76 90.06,44.81 90.17,44.91 90.17,45.76 | 88.9,39.12 87.25,39.12 87,39.37 BUTTON2.1 | v91.19,46.35 90.17,46.35 90.17,45.76 | 90.17,45.76 C1_BAT2.2 | C7.2 90.81,64.14 90.55,64.14 89.53,63.12 BUTTON1.1 89.41,62.99 89.03,62.61 v89.03,61.98 87.63,60.58 87,60.58 BUTTON1.2 86.87,60.45 85.85,59.44 85.6,59.44 C2.1 v86.45,59.31 v86.45,59.32
  Top 0.127: 84.2,45.59 84.2,45.97 82.8,47.37 82.8,49.91 Q1.2 82.68,50.04 v82.68,51.18 | v83.82,51.31 83.57,51.56 83.57,52.2 C1.1 | 88.27,51.44 88.14,51.56 | 88.14,51.56 87.88,51.82 87.88,52.83 C2_BAT.2 | 89.41,51.44 88.27,51.44 | 88.27,51.44 87.25,50.42 87.25,49.78 U1.2 87.12,49.66 87.12,46.86 86,45.75 86,44.52 85.58,44.09 84.87,44.09 84.51,44.46 84.51,45.29 84.2,45.59 | v87.63,54.61 87.12,55.12 87.12,56.9 87.25,57.02 87.25,57.4 IC6.8 | 88.14,51.56 v88.01,51.44 | J2.B12 96.9,38.99 96.77,38.99 J2.A1 96.65,38.86 95.38,38.86 95,38.48 J2.MP3 94.87,38.48 92.46,40.89 92.08,40.89 D6.2 91.95,41.02 91.57,41.4 91.44,41.4 91.19,41.66 91.19,42.67 91.95,43.43 91.95,43.69 R2_BAT.1 | 94.36,49.15 93.09,47.88 C1_BAT1.2 | 94.36,49.15 94.49,49.28 94.49,50.29 94.23,50.55 94.11,50.55 93.85,50.8 IC4.2 93.73,50.8 93.09,50.8 v92.71,50.42 | 93.34,43.81 92.08,43.81 R2_BAT.1 | 93.34,43.81 93.85,43.81 D4.1 93.98,43.81 94.74,43.05 96.14,43.05 IC5.64 | 94.36,49.15 95.63,47.88 96.65,47.88 96.9,47.62 96.9,45.47 96.77,45.34 93.98,45.34 93.98,45.08 93.9,45 93.6,45 93.34,44.7 93.34,43.81 | v97.79,62.99 97.79,64.39 C3.- | v95.38,57.4 95.76,57.02 96.14,57.02 IC5.63 | v89.41,50.8 89.41,51.44 | 89.41,51.44 R1_PWRUSB.1 | R2_BAT.1 92.55,44.28 92.55,44.4 91.95,45 v91.95,45.59 | R12.1 84.16,43.99 84.47,44.29 84.47,44.88 84.34,45.01 84.2,45.4 84.2,45.59
  Bottom 0.127: v103.25,57.78 103.25,56.01 104.39,54.86 v104.39,53.47 | v104.14,63.63 104.78,62.99 104.78,62.48 TP4.TP | 102.49,42.04 104.52,42.04 105.28,42.8 J3.G1 | 102.49,42.04 101.47,42.04 100.71,42.8 99.69,42.8 J3.G2 | v102.49,41.53 102.49,42.04 | v108.33,55.75 108.33,57.02 J3.G3 108.33,57.15 108.71,57.53 108.71,61.21 108.58,61.34 108.58,63.37 108.71,63.5 v108.71,63.75 | v105.2,44.41 105.2,43.01 105.28,42.93 J3.G1 | J1.12 91.57,46.86 91.19,46.48 v91.19,46.35 v91.95,45.59 | v89.03,61.98 89.03,62.23 91.44,64.64 91.69,64.64 IC2.4 | v82.68,51.18 82.8,51.31 v83.82,51.31 83.82,56.13 86.45,58.77 v86.45,59.32 | v87.63,54.61 87.63,51.82 v88.01,51.44 | v97.79,62.99 95.89,62.99 95.76,62.87 IC2.9 95.63,62.74 95.63,61.72 93.6,59.69 93.6,58.67 94.87,57.4 v95.38,57.4 95.38,56.26 | 91.69,50.42 91.69,50.04 J1.6 | 90.17,50.8 90.17,51.56 90.93,52.32 91.57,52.32 J1.1 91.69,52.32 93.47,52.32 94.61,53.47 94.61,53.98 96.14,55.5 | 90.17,50.8 90.55,50.42 91.57,50.42 J1.5 91.69,50.42 | 95.38,56.26 95.25,56.13 J3.G4 95.38,56.26 | 95.38,56.26 96.14,55.5 | 96.14,55.5 97.92,53.72 97.92,53.47 J3.P6 | 91.69,50.42 v92.71,50.42 | 90.17,50.8 v89.41,50.8 | v110.36,38.61 109.47,38.61 106.55,41.53 106.55,41.66 105.41,42.8 J3.G1
IMU_INT1  (via drill 0.3)
  Top 0.127: v109.09,63.25 108.33,63.25 IC3.16 | v106.17,54.61 105.92,54.61 104.65,55.88 101.47,55.88 101.22,55.63 100.97,55.63 100.58,56.01 100.58,56.9 IC5.11
  Bottom 0.127: v109.09,63.25 109.09,58.29 109.22,58.17 109.22,56.01 107.82,54.61 v106.17,54.61
IMU_INT2  (via drill 0.3)
  Top 0.127: v105.54,60.07 106.43,60.07 106.93,60.58 106.93,61.47 107.44,61.98 107.44,62.23 IC3.1 | v104.39,52.83 103.5,53.72 v103.5,54.36 | v102.23,57.78 101.47,57.02 IC5.10
  Bottom 0.127: v105.54,60.07 105.54,59.69 105.79,59.44 105.79,57.15 105.41,56.77 105.41,53.85 v104.39,52.83 | v103.5,54.36 103.5,55.37 102.23,56.64 v102.23,57.78
IN_DRV  (via drill 0.3)
  Top 0.127: v93.6,54.61 94.87,55.88 96.14,55.88 IC5.16 | v88.65,54.1 86.49,54.1 85.98,53.59 85.98,53.34 IC6.4
  Bottom 0.127: v93.6,54.61 92.33,53.34 90.42,53.34 90.17,53.09 89.66,53.09 v88.65,54.1
LEDA  (1 unrouted)
LEDK  (via drill 0.3)
  Top 0.127: v88.39,48.64 v90.68,50.93 | v85.22,54.86 84.58,54.86 82.68,52.96 82.68,51.82 83.57,50.93 83.57,48.39 Q1.3
  Bottom 0.127: v90.68,50.93 90.68,51.56 91.06,51.94 91.57,51.94 J1.2 | v88.39,48.64 88.39,50.04 85.22,53.21 v85.22,54.86
MISO  (via drill 0.3)
  Top 0.127: 98.93,42.93 99.82,42.04 103,42.04 104.9,40.13 D2.2 | v97.79,60.83 97.28,61.34 96.77,61.34 R8.2 | v93.47,60.2 95,58.67 v96.14,58.67 96.52,58.67 97.66,57.53 97.66,54.74 96.77,53.85 v95.12,53.85 94.87,53.59 94.87,50.29 95.25,49.91 v95.25,49.4 | 98.93,42.93 98.3,42.29 95.5,42.29 95,42.8 94.36,42.8 v93.98,43.18 | 98.93,42.93 IC5.33
  Bottom 0.127: v97.79,60.83 97.79,60.71 97.41,60.33 97.28,60.33 96.14,59.18 v96.14,58.67 | v93.47,60.2 93.47,60.45 93.73,60.71 93.73,61.21 92.84,62.1 91.82,62.1 IC2.2 | v95.12,53.85 95.12,53.98 95.38,54.23 96.27,54.23 96.9,53.59 96.9,53.34 J3.P7 | v93.98,43.18 94.74,43.94 94.87,43.94 95.25,44.32 v95.25,49.4
MOSI  (via drill 0.3)
  Top 0.127: v91.82,38.23 92.12,38.23 93,37.2 93.3,36.9 93.9,36.6 94.2,36.6 104.14,36.45 104.65,36.96 107.44,36.96 110.11,39.62 110.11,39.75 108.84,41.02 108.84,41.4 D3.2 108.71,41.53 v108.71,42.29 | v97.28,44.45 97.28,43.05 IC5.31 | v101.09,56.13 101.09,57.53 100.08,58.55 100.08,58.93 R6.2 | v90.68,63.25 v92.58,65.15 | v93.22,60.83 93.47,60.83 95.12,59.18 96.9,59.18 98.55,57.53 98.55,56.52 98.04,56.01 98.04,51.94 v99.06,50.93 99.06,49.28 101.85,46.48 v102.11,46.48
  Bottom 0.127: v91.82,38.23 91.01,39.03 91.01,45.89 90.77,46.14 90.77,47.88 91.57,47.88 J1.10 | v97.28,44.45 97.28,44.7 100.08,47.5 100.08,50.93 | 100.08,50.93 100.08,51.82 101.22,52.96 101.22,53.21 J3.P3 101.22,53.34 101.09,53.47 v101.09,56.13 | v92.58,65.15 93.22,65.79 97.66,65.79 98.68,64.77 99.57,64.77 IC2.5 | v90.68,63.25 90.68,62.23 91.19,61.72 92.33,61.72 92.46,61.85 92.71,61.85 93.22,61.34 v93.22,60.83 | 100.08,50.93 v99.06,50.93 | v108.71,42.29 108.71,43.18 105.41,46.48 v102.11,46.48
N$1  (via drill 0.3)
  Top 0.127: v104.52,36.2 106.93,36.2 R2-USB.1 | v103.76,36.96 102.11,36.96 101.73,37.34 101.73,38.86 J2.B5
  Bottom 0.127: v103.76,36.96 v104.52,36.2
N$2  (via drill 0.3)
  Top 0.127: v106.3,40.13 107.31,40.13 R1-USB.2 | v99.19,37.97 98.81,38.35 98.81,38.86 J2.A5
  Bottom 0.127: v106.3,40.13 102.11,40.13 99.95,37.97 v99.19,37.97
N$3
  Top 0.127: C1.2 84.58,51.82 84.58,52.83 84.33,53.09 84.33,53.72 84.45,53.85 IC6.1
N$4  (via drill 0.3)
  Top 0.127: v88.39,51.94 88.39,52.45 89.15,53.21 89.15,54.74 D1.1 | 93.6,52.07 93.73,51.94 IC4.3 93.6,52.07 | 93.6,52.07 93.34,52.32 v93.34,52.83 93.98,53.47 93.98,53.72 T1.2 | 92.58,49.91 93.73,49.91 IC4.1 | 92.58,49.91 92.2,49.53 92.2,47.24 92.96,46.48 92.96,46.23 C1_BAT1.1 | 93.6,52.07 92.39,50.87 92.39,50.75 92.29,50.65 92.29,50.2 92.58,49.91
  Bottom 0.127: v88.39,51.94 88.39,52.45 88.77,52.83 89.15,52.83 89.41,52.58 90.68,52.58 90.93,52.83 v93.34,52.83
N$5  (via drill 0.3)
  Top 0.127: v86.74,43.69 87.38,44.32 CHG_LED.C | v86.74,41.78 87.25,42.29 R1_BAT.1
  Bottom 0.127: v86.74,41.78 v86.74,43.69
N$6
  Top 0.127: R6-ESP1.2 99.69,67.06 99.69,63.12 100.08,62.74 SJ1.1
N$7
  Top 0.127: 102.23,67.06 102.62,67.06 102.74,66.93 R7-ESP1.1 | 102.23,67.06 100.97,67.06 R6-ESP1.1 | 102.23,67.06 102.23,65.15 SJ2.2
N$8  (via drill 0.3)
  Top 0.127: v88.77,46.74 88.24,46.74 U1.5 | R2_BAT.2 90.68,43.87 90.68,44.44 v90.48,44.63
  Bottom 0.127: v88.77,46.74 90.42,45.09 90.42,44.92 90.48,44.87 v90.48,44.63
N$9  (via drill 0.3)
  Top 0.127: v83.06,46.48 83.31,46.23 83.31,45.26 R12.2 | v84.33,46.48 84.71,46.48 84.71,49.91 | R11.1 85.26,45.68 84.71,49.91 | 84.71,49.91 Q1.1
  Bottom 0.127: v84.33,46.48 v83.06,46.48
N$10  (via drill 0.3)
  Top 0.127: R1_BAT.2 88.39,43.18 88.39,43.56 89.65,44.82 v89.65,44.83 | U1.1 88.01,49.66 87.88,49.53 87.88,48.56 88.7,47.74 v88.73,47.74
  Bottom 0.127: v88.73,47.74 88.73,47.67 88.77,47.62 88.27,47.12 88.27,46.61 89.65,45.23 v89.65,44.83
N$11
  pour Top: 70.1,81.15 118.75,81.15 136.65,63.25 136.65,38.23 116.2,17.78 78.11,17.78 69.98,25.91 69.98,81.28 69.98,81.03
N$12
  pour Bottom: 83.82,83.31 122.43,83.31 129.67,76.07 129.67,32.77 118.49,21.59 86.87,21.59 77.85,30.61 77.85,73.03 83.95,79.12 83.95,83.31 83.82,83.19
PIN_LED  (1 unrouted)
PPG_INT  (via drill 0.3)
  Top 0.127: v101.3,45.12 101.3,43.21 IC5.36 | v105.79,50.8 105.79,52.7 103.63,54.86 103.38,54.86 103,54.48 103,54.36 102.62,53.98 102.23,53.98 100.2,56.01 100.2,57.53 99.57,58.17 v99.19,58.17
  Bottom 0.127: v101.3,45.12 101.3,46.31 v105.79,50.8 | v99.19,58.17 98.93,58.17 98.04,57.28 96.65,57.28 94.87,59.05 TP8.TP
RESET  (via drill 0.3)
  Top 0.127: C5.1 109.35,36.07 109.73,36.07 110.49,36.83 RESET_BUTTON.3 110.62,36.96 112.9,39.24 113.16,39.24 RESET_BUTTON.4 113.28,39.37 113.28,40.64 112.39,41.53 110.11,41.53 | v109.22,43.81 109.22,43.05 IC5.45 | 110.11,41.53 110.11,40.77 R1-ESP.1 | v104.9,54.23 104.9,53.98 106.3,52.58 106.3,46.99 v106.17,46.86 | 110.11,41.53 v110.11,41.66
  Bottom 0.127: v110.11,41.66 109.22,42.55 v109.22,43.81 v106.17,46.86 | v104.9,54.23 105.03,54.36 105.03,57.02 104.52,57.53 104.52,58.93 TP9.TP
RX  (via drill 0.3)
  Top 0.127: v99.57,48.13 99.57,47.7 100.2,47.7 102.3,45.6 104.66,43.6 104.66,43.25 IC5.40 | v99.57,50.42 99.57,51.69 98.55,52.7 v98.55,55.88
  Bottom 0.127: v99.57,50.42 v99.57,48.13 | v98.55,55.88 98.55,56.9 100.71,59.05 TP11.TP
SCK  (via drill 0.3)
  Top 0.127: 97.41,44.96 97.16,44.96 96.65,44.45 v94.74,44.45 93.98,44.45 D4.2 | 97.41,44.96 98.04,44.32 98.04,43.69 | 98.04,43.69 98.04,43.05 IC5.32 | 104.14,42.29 100.46,42.29 100.2,42.55 100.2,43.56 100.08,43.69 98.04,43.69 | 104.14,42.29 105.92,42.29 106.17,42.55 106.17,43.81 106.68,44.32 106.68,55.37 106.05,56.01 106.05,56.26 106.17,56.39 106.17,57.53 106.05,57.66 105.79,57.66 105.16,58.29 105.16,59.56 106.3,59.56 107.19,60.45 107.19,60.58 107.44,60.83 R5.2 | 104.14,42.29 v104.14,41.53 | v97.28,51.56 97.28,50.67 98.04,49.91 98.04,45.59 97.41,44.96
  Bottom 0.127: v104.14,41.53 103.12,41.53 101.6,40.01 100.58,40.01 97.79,37.21 91.44,37.21 90.25,38.4 90.25,41.19 84.71,46.74 84.71,55.75 87.12,58.17 87.12,60.71 90.42,64.01 90.42,64.39 91.19,65.15 91.82,65.15 92.71,66.04 99.31,66.04 100.33,65.02 100.33,64.39 99.69,63.75 99.69,63.5 IC2.6 | v94.74,44.45 94.74,45.97 92.33,48.39 91.69,48.39 J1.9 | v97.28,51.56 97.54,51.56 98.68,52.7 98.68,52.83 99.06,53.21 J3.P5
SCL  (via drill 0.3)
  Top 0.127: v104.39,65.41 104.39,65.15 104.78,64.77 IC3.8 | v100.58,51.05 99.06,52.58 99.06,56.9 IC5.13 | v86.11,51.56 84.84,52.83 84.84,53.09 84.96,53.21 84.96,53.59 IC6.2
  Bottom 0.127: TP6.TP 102.23,64.9 102.74,65.41 v104.39,65.41 104.78,65.79 107.7,65.79 110.24,63.25 110.24,56.64 104.65,51.05 v100.58,51.05 100.58,47.62 98.42,45.47 98.42,42.16 98.55,42.04 100.33,42.04 101.47,40.89 101.47,40.64 101.09,40.26 98.55,40.26 95.76,37.47 91.57,37.47 90.5,38.53 90.5,41.32 86.11,45.72 v86.11,51.56
SDA  (via drill 0.3)
  Top 0.127: v105.03,65.28 105.28,65.53 105.66,65.53 IC3.9 | v100.58,51.69 99.82,52.45 99.82,56.9 IC5.12 99.82,57.02 99.19,57.66 98.81,57.66 97.03,59.44 95.25,59.44 93.34,61.34 v92.58,61.34 | v85.98,54.48 85.6,54.1 85.6,53.59 IC6.3
  Bottom 0.127: v105.03,65.28 104.27,64.52 103.5,64.52 102.62,63.63 102.62,61.64 TP7.TP 103.76,61.21 105.28,61.21 105.92,61.85 107.31,61.85 108.08,61.09 108.08,60.2 106.81,58.93 106.81,57.78 105.66,56.64 105.66,53.47 103.89,51.69 v100.58,51.69 | v85.98,54.48 85.98,56.64 88.52,59.18 88.52,59.94 89.92,61.34 v92.58,61.34
SS_FLASH  (via drill 0.3)
  Top 0.127: v91.82,60.2 95.63,56.39 96.65,56.39 96.9,56.13 96.9,54.86 96.65,54.61 96.52,54.61 96.27,54.36 IC5.18
  Bottom 0.127: v91.82,60.2 91.82,60.83 IC2.1
SS_SD  (via drill 0.3)
  Top 0.127: 104.65,60.58 106.55,60.58 106.68,60.71 106.68,61.34 106.43,61.59 106.17,61.59 D5.2 | 104.65,60.58 104.39,60.83 R4.2 | 104.14,57.78 104.14,60.07 104.65,60.58 | 104.14,57.78 104.14,57.02 IC5.7 | v102.49,54.48 103.38,55.37 v104.52,55.37 | 104.14,57.78 v103.89,57.78
  Bottom 0.127: v102.49,54.48 102.49,52.96 J3.P2 | v104.52,55.37 104.52,57.15 v103.89,57.78
SS_TFT  (via drill 0.3)
  Top 0.127: v96.9,50.42 96.9,51.05 96.27,51.69 IC5.21
  Bottom 0.127: v96.9,50.42 96.01,50.42 95.5,49.91 93.22,49.91 92.33,49.02 91.69,49.02 J1.8
TFT_DC  (via drill 0.3)
  Top 0.127: v95.38,50.42 95.76,50.8 96.14,50.8 IC5.22
  Bottom 0.127: v95.38,50.42 93.34,50.42 92.46,49.53 91.69,49.53 J1.7
TX  (via drill 0.3)
  Top 0.127: v100.84,46.35 103.63,43.56 103.63,43.43 104.01,43.05 IC5.39
  Bottom 0.127: v100.84,46.35 105.28,50.8 105.28,50.93 105.66,51.31 105.92,51.31 110.49,46.74 110.49,41.91 110.87,41.53 110.87,38.48 108.58,36.2 107.82,36.2 TP12.TP
VBAT  (via drill 0.3)
  Top 0.127: v91.82,59.44 93.47,57.78 93.47,57.53 93.09,57.15 93.09,55.88 T1.3 92.96,55.88 91.31,55.88 v90.93,56.26 | U1.3 86.23,49.78 86.23,50.04 87,50.8 87,51.82 C2_BAT.1 87,51.94 v87,53.09 | v89.92,64.14 90.81,65.02 91.82,65.02 92.96,66.17 98.93,66.17 99.31,65.79 99.31,61.72 99.44,61.59 100.84,61.59 101.6,62.36 101.6,62.61 SJ1.2 | v85.6,57.28 85.6,56.01 v87,54.61
  Bottom 0.127: v91.82,59.44 89.79,59.44 TP5.TP | v89.92,64.14 89.92,63.88 86.87,60.83 86.87,58.55 v85.6,57.28 | v87,53.09 v87,54.61 88.65,56.26 v90.93,56.26
VBUS  (via drill 0.3)
  Top 0.127: 90.04,57.66 90.04,58.17 89.28,58.93 89.28,59.05 92.08,61.85 94.23,61.85 94.49,61.59 PFMF.050.1.2 | 90.04,57.66 90.04,56.77 D1.2 | C4_USB.2 v100.97,40.77 100.08,40.77 C5_USB.1 | v87.38,46.48 88.39,45.47 CHG_LED.A | v86.61,48.13 86.61,47.5 86.23,47.12 U1.4 | v89.41,43.94 89.41,41.53 C1_BAT.1 | v88.9,52.32 89.28,52.7 89.66,52.7 R1_PWRUSB.2 89.79,52.83 90.04,53.09 v90.04,53.59 | v90.93,54.48 91.57,53.85 92.08,53.85 T1.1 | v95.63,40.64 95.38,40.89 94.61,40.89 D6.5 | v89.66,57.66 90.04,57.66
  Bottom 0.127: 87.38,47.37 v87.38,46.48 89.41,44.45 v89.41,43.94 90.76,42.59 90.76,38.65 91.69,37.72 91.95,37.72 94.87,40.64 v95.63,40.64 95.76,40.77 v100.97,40.77 | v86.61,48.13 87.38,47.37 | 88.9,50.93 88.9,48.51 87.76,47.37 87.38,47.37 | 88.9,50.93 v88.9,52.32 | v90.04,53.59 v90.93,54.48 | v89.66,57.66 89.41,57.66 86.49,54.74 86.49,52.32 87.88,50.93 88.9,50.93
VIBE_OUT+  (via drill 0.3)
  Top 0.127: v86.61,56.64 86.61,57.15 86.87,57.4 86.87,57.66 IC6.9
  Bottom 0.127: v86.61,56.64 88.01,56.64 89.53,58.17 92.08,58.17 92.2,58.04 TP1.TP
VIBE_OUT-  (via drill 0.3)
  Top 0.127: v88.52,55.37 87.5,56.39 87.5,56.64 87.76,56.9 87.76,57.15 IC6.7
  Bottom 0.127: v88.52,55.37 90.55,55.37 90.81,55.12 92.2,55.12 TP2.TP
VUSB  (via drill 0.3)
  Top 0.127: J2.A4 97.54,38.99 97.66,38.99 J2.B9 97.79,38.86 97.79,38.35 98.17,37.97 | J2.A9 102.49,38.99 102.36,38.99 J2.B4 102.23,38.86 v102.23,37.47 | v98.68,37.47 98.17,37.97 | 98.17,37.97 97.28,37.08 93.73,37.08 92.33,38.48 92.33,38.99 91.82,39.5 91.44,39.5 91.06,39.88 91.06,41.4 90.93,41.53 90.93,42.8 91.44,43.31 91.44,45.97 91.95,46.48 91.95,50.67 92.14,50.86 92.14,51.37 92.84,52.07 92.84,54.23 91.44,55.63 v90.93,55.63 | v91.44,56.64 91.44,58.29 PFMF.050.1.1
  Bottom 0.127: v102.23,37.47 v98.68,37.47 | v90.93,55.63 91.44,56.13 v91.44,56.64

## Text on the board
SilkscreenBottom: SCL | BOOT | SDA | GND | 3V3 | VBAT | VIBE_OUT+ | PPG_INT | RX | RESET | VIBE_OUT- | TX